# Altium PCB exam.PcbDoc
Units mm, origin at the board's own origin, x right, y up, seen from the top; angles counter-clockwise.
Board outline 57.4 x 46.48 mm, 2 copper layers (Top Layer, Bottom Layer); 19 components, 9 nets, 45 pads, 1 vias.
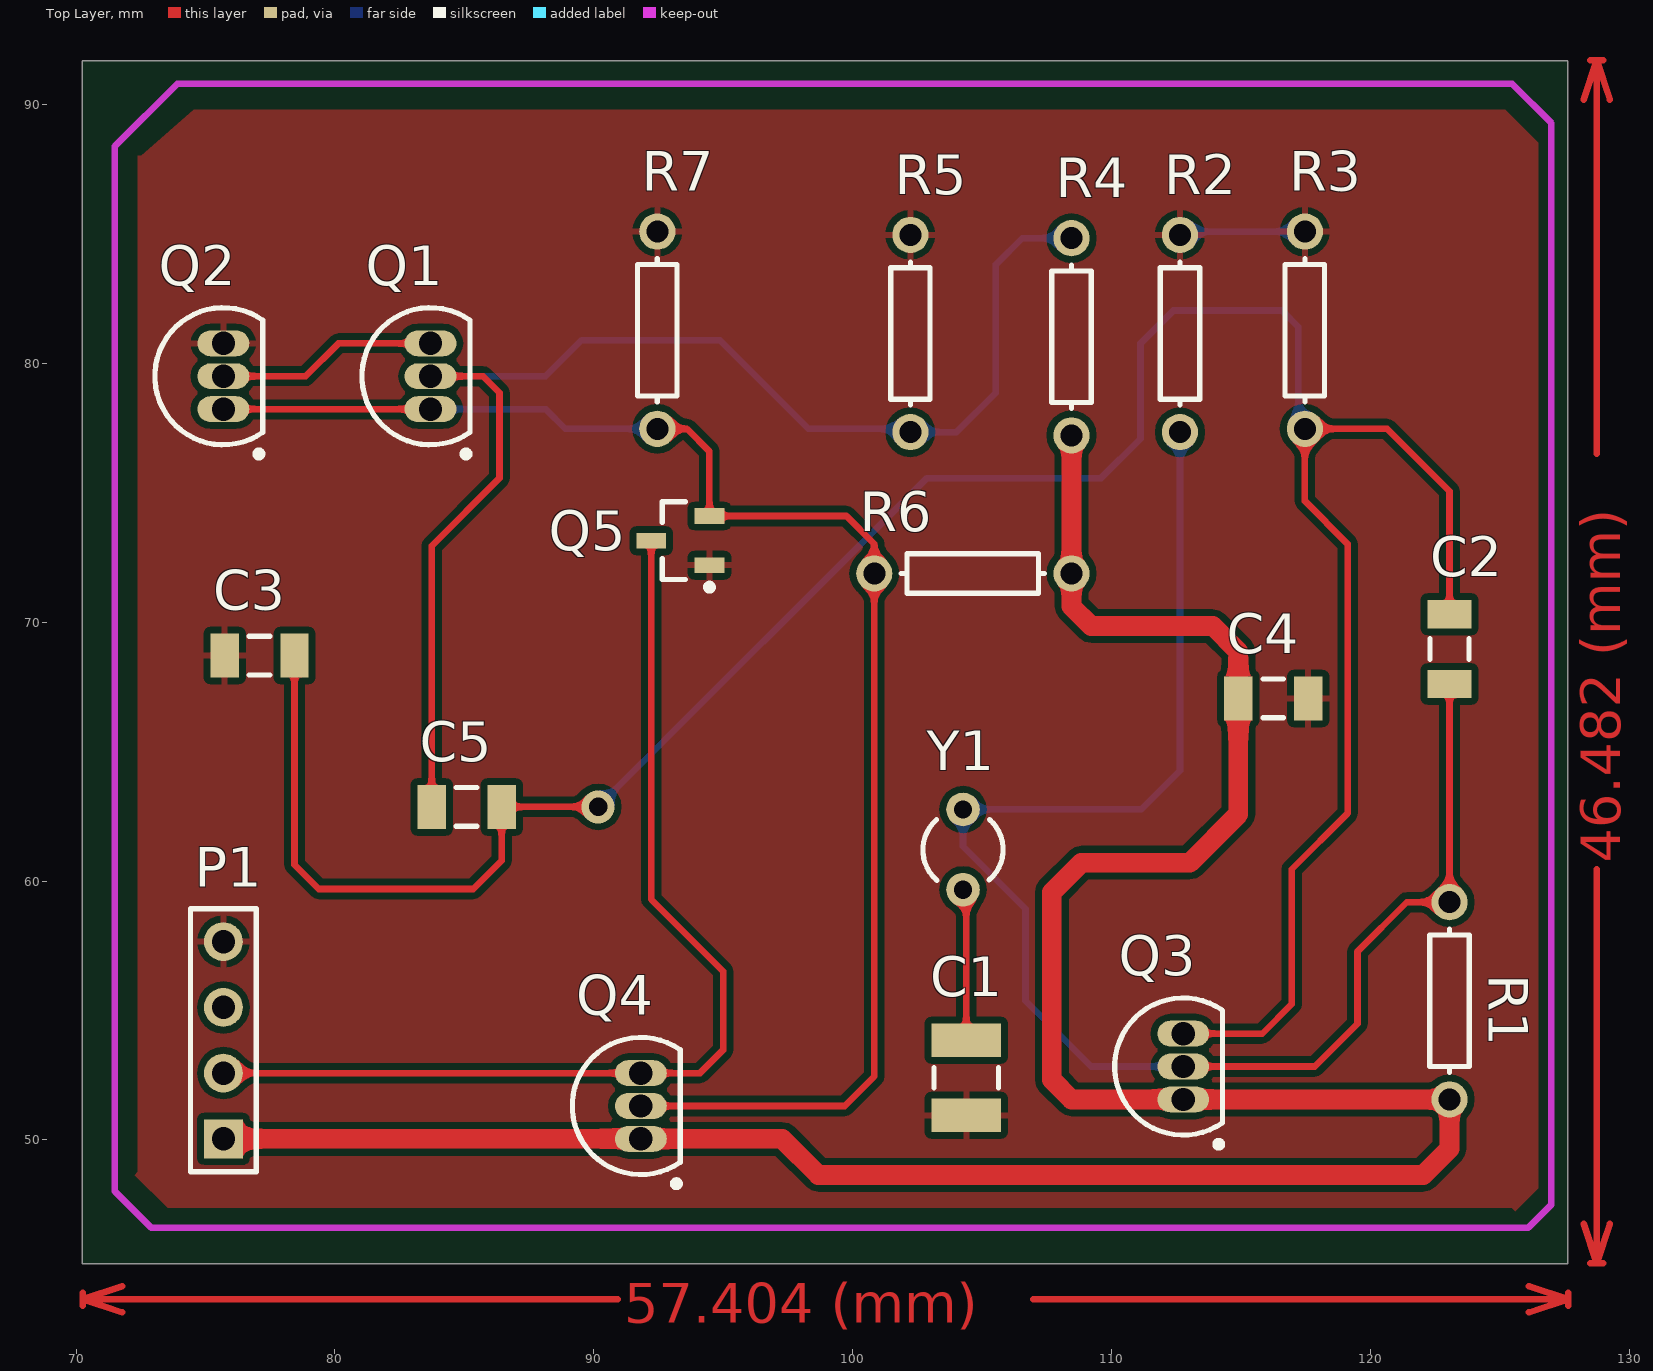
[diagram p0: Top Layer view]
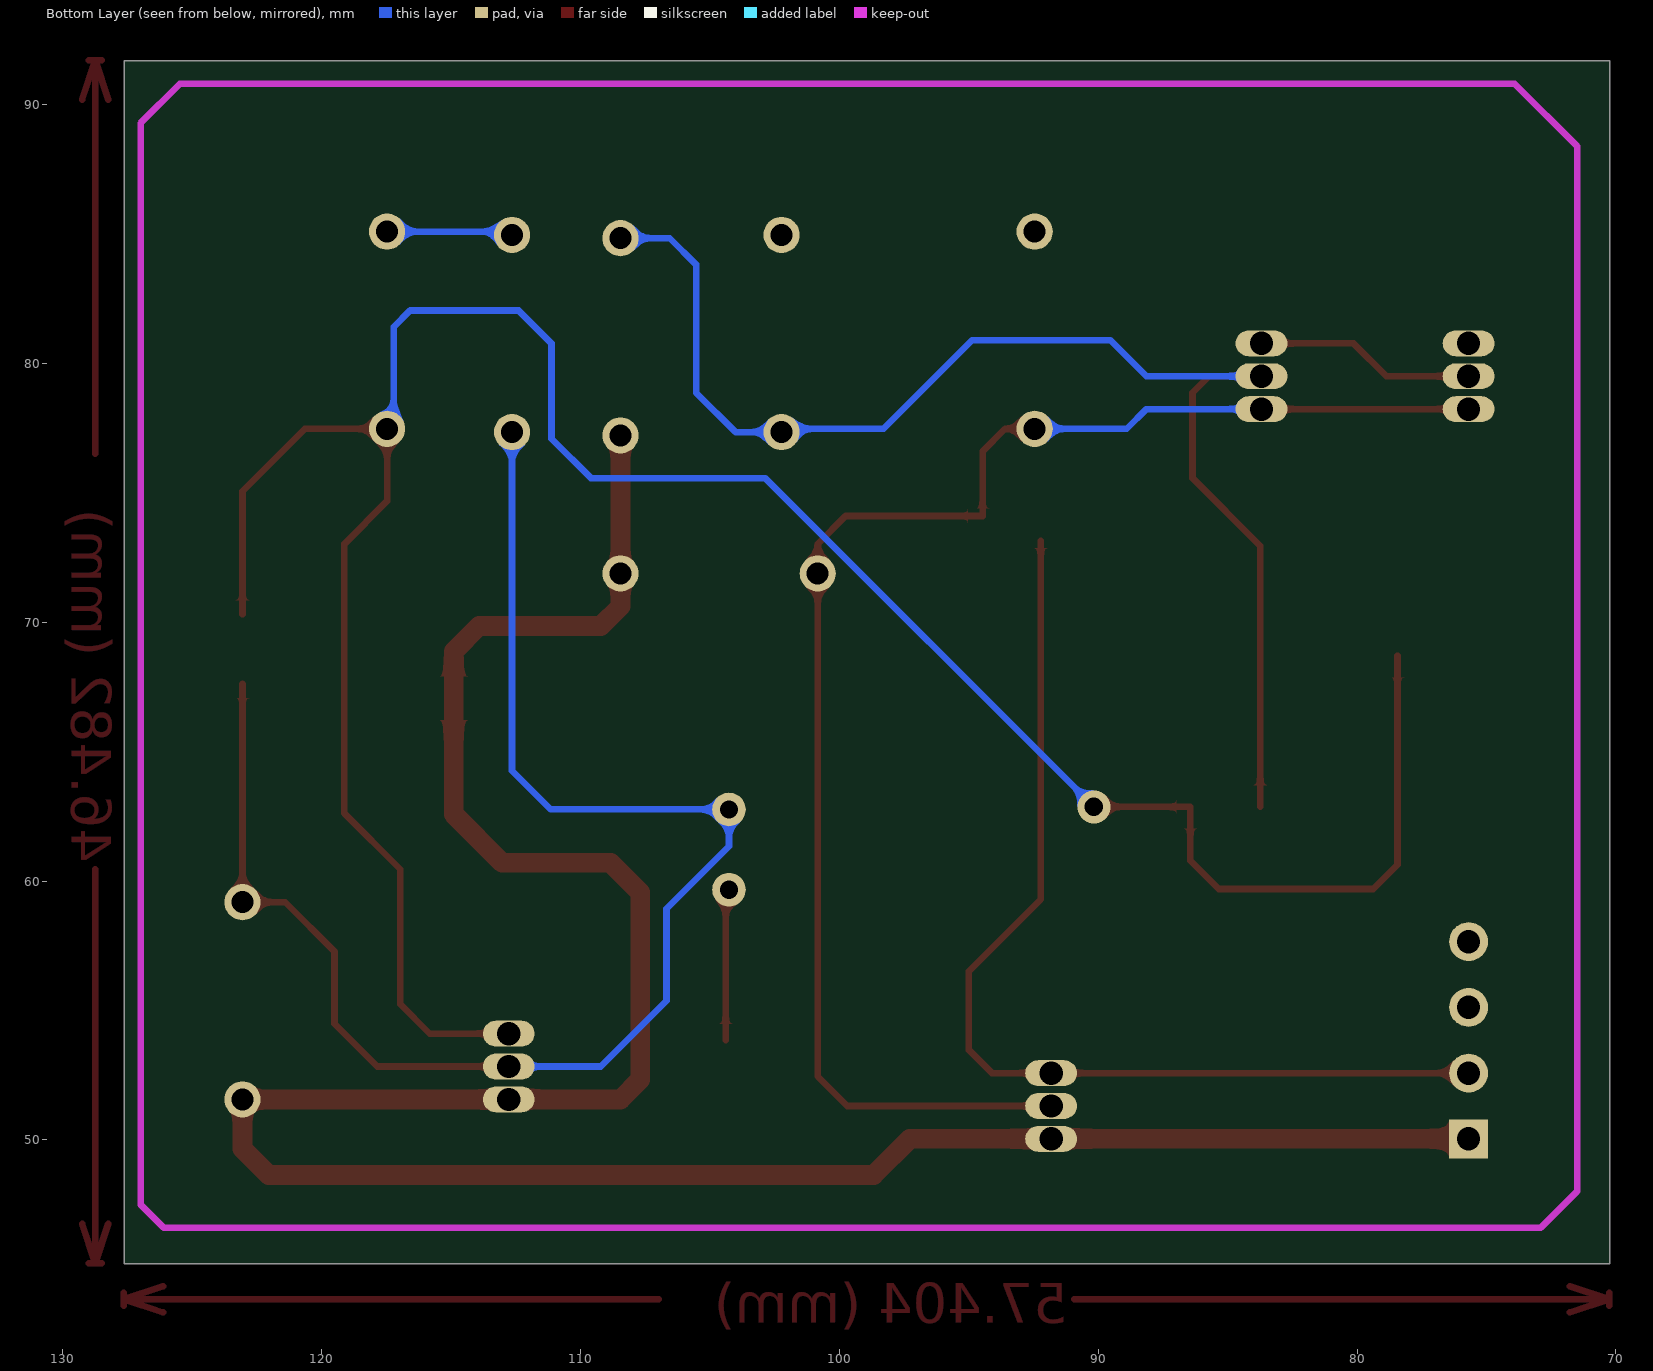
[diagram p1: Bottom Layer view, seen from below]

## Layer stack, top to bottom
Top Solder: solder mask 0.0102, Solder Resist, Dk 3.5
Top Layer: signal copper 0.0356
Dielectric 1: dielectric 0.32, FR-4, Dk 4.8
Bottom Layer: signal copper 0.0356
Bottom Solder: solder mask 0.0102, Solder Resist, Dk 3.5

## Board outline
70.231,45.212 127.635,45.212 127.635,91.694 70.231,91.694

## Design rules (kind name [scope] priority, off if disabled: settings)
Clearance [All] p1: gap=0.254 ignorepadtopadclearanceinfootprint=FALSE except(0: Arc-Hole Track-Hole SMDPad-Hole THPad-Hole Via-Hole Fill-Hole Poly-Hole Region-Hole Text-Hole)
MinimumSolderMaskSliver [All] p1: minsoldermaskwidth=0.066
PolygonConnect [All] p1: connectstyle=Relief reliefconductorwidth=0.254 reliefentries=4 polygonreliefangle="90 Angle" airgapwidth=0.254
RoutingVias [All] p1: holewidth=0.711 width=1.27 viastyle="Through Hole" minholewidth=0.711 minwidth=1.27 maxholewidth=0.711 maxwidth=1.27
SilkToSolderMaskClearance [IsPad] p1: minsilkscreentomaskgap=0.239 clearancetoexposedcopper=TRUE
SolderMaskExpansion [All] p1: expansion=0.102
Width VCC [InNet('VCC')] p1: maxlimit=1.016 minlimit=0.254 preferedwidth=0.762
Width [All] p2: maxlimit=0.254 minlimit=0.254 preferedwidth=0.254
28 further rules are at their usual default settings.

## Components (designator, comment, footprint, x,y, rotation, side; value= is the part's Value field where it differs from the comment)
C1 "Cap Var" C1210_N 104.394,52.398 r90 top value=60pF
C2 "Cap Semi" C1206 123.063,68.961 r270 top value=100pF
C3 "Cap Semi" C1206 77.089,68.707 r0 top value=100pF
C4 "Cap Semi" C1206 116.252,67.056 r180 top value=10nF
C5 "Cap Semi" C1206 85.09,62.865 r180 top value=1nF
P1 "Header 4" HDR1X4 75.692,50.038 r90 top
Q1 "NPN" TO-226-AA 83.693,79.502 r0 top
Q2 "NPN" TO-226-AA 75.692,79.502 r0 top
Q3 "NPN" TO-226-AA 112.776,52.832 r0 top
Q4 "NPN" TO-226-AA 91.821,51.308 r0 top
Q5 "PNP" SOT-23B_N 93.345,73.152 r180 top
R1 "Res1" AXIAL-0.3 123.063,55.372 r270 top value=47K
R2 "Res1" AXIAL-0.3 112.649,81.153 r270 top value=33K
R3 "Res1" AXIAL-0.3 117.475,81.28 r270 top value=1K
R4 "Res1" AXIAL-0.3 108.458,81.026 r270 top value=56K
R5 "Res1" AXIAL-0.3 102.235,81.153 r270 top value=17K
R6 "Res1" AXIAL-0.3 104.648,71.882 r0 top value=1K
R7 "Res1" AXIAL-0.3 92.456,81.28 r270 top value=22K
Y1 "14.31818MHz" R38 104.267,61.214 r0 top

## Footprints (in the part's own frame and the unit in brackets; to place one, negate y for a bottom-side part, rotate by r counter-clockwise, add the part's x,y. Pads: shape width x height; smd on the part's side, far side on the other; paste and mask are expansions set on the pad)
AXIAL-0.3 [mm] "Axial Device, Thru-Hole; 2 Leads; 0.3 in Pin Spacing"
  round 1.4 hole 0.85: 1(-3.81,0) 2(3.81,0)
  silkscreen extent -2.77,-0.76 2.77,0.76
C1206 [mm] "Chip Capacitor, Body 3.2x1.6mm, IPC High Density"
  rect 1.1x1.7 smd: 1(-1.35,0) 2(1.35,0)
  silkscreen extent -0.4,-0.75 0.4,0.75, body extent -1.7,-0.9 1.7,0.9, height 1.3
C1210_N [mm] "Chip Capacitor, Body 3.2x2.5mm, IPC Medium Density"
  rect 1.3x2.7 smd: 1(-1.45,0) 2(1.45,0)
  silkscreen extent -0.4,-1.25 0.4,1.25, body extent -1.7,-1.35 1.7,1.35, height 1.5
HDR1X4 [mm] "Connector; Header; 4 Position"
  rect 1.5x1.5 hole 0.9: 1(0,0)
  round 1.5 hole 0.9: 2(2.54,0) 3(5.08,0) 4(7.62,0)
  silkscreen extent -1.27,-1.27 8.89,1.27
R38 [mm] "Crystal, Thru-Hole; 2 Leads; Body 3.1 x 8.2 mm (Dia.xH)"
  round 1.3 hole 0.7: 1(0,1.55) 2(0,-1.55)
  silkscreen extent -1.55,-1.19 1.55,1.17
SOT-23B_N [mm] "SOT23, 3-Leads, Body 2.9x1.3mm, Pitch 0.95mm, Lead Span 2.4mm, IPC Medium Density"
  rect 1.15x0.6 smd: 1(-1.125,0.95) 2(-1.125,-0.95) 3(1.125,0)
  silkscreen extent -1.25,-1.5 0.7,1.92, body extent -0.7,-1.5 0.7,1.5, height 1.14
TO-226-AA [mm] "TO, Flat Index; 3 In-Line, Axial Leads; Body Dia. 4.8mm; Leads 0.55 x 0.51 mm (max)"
  oval 2x1 hole 0.9: 1(0,-1.27) 2(0,0) 3(0,1.27)
  silkscreen extent -2.65,-3.13 1.52,2.65, body extent -2.65,-2.66 1.52,2.66, height 5.33

## Part data
C1: "Variable or Adjustable Capacitor", Code_IPC=CAPC3225, Code_JEITA=1210, LatestRevisionDate=29-May-2009, LatestRevisionNote="IPC-7351 Footprint Added.", PackageDescription="Chip Capacitor 1210 Case Size", PackageReference=C1210, Published=24-Mar-1999, Publisher="Altium Limited"
C2 C3 C4 C5: "Capacitor (Semiconductor SIM Model)", LatestRevisionDate=29-May-2009, LatestRevisionNote="IPC-7351 Footprint Added.", PackageDescription="Chip Capacitor", PackageReference=C1206, Published=8-Jun-2000, Publisher="Altium Limited"
P1: "Header, 4-Pin", LatestRevisionDate=17-Jul-2002, LatestRevisionNote="Re-released for DXP Platform.", Publisher="Altium Limited"
Q1 Q2 Q3 Q4: "NPN Bipolar Transistor", Code_JEDEC=TO-226-AA, LatestRevisionDate=17-Jul-2002, LatestRevisionNote="Re-released for DXP Platform.", PackageDescription="TO, Flat Index; 3 In-Line, Axial Leads; Body Dia. 4.8mm; Leads 0.55 x 0.51 mm (max)", PackageReference=TO-226-AA, Published=8-Jun-2000, Publisher="Altium Limited"
Q5: "PNP Bipolar Transistor", LatestRevisionDate=29-May-2009, LatestRevisionNote="IPC-7351 Footprint Added.", PackageDescription="3-Pin SOT-23 Package 0.95 mm Pitch, 2.4 mm Lead Span", PackageReference=SOT-23B, PackageVersion=Aug-1999, Published=8-Jun-2000, Publisher="Altium Limited"
R1 R2 R3 R4 R5 R6 R7: "Resistor", LatestRevisionDate=17-Jul-2002, LatestRevisionNote="Re-released for DXP Platform.", PackageDescription="Axial Device, Thru-Hole; 2 Leads; 0.3 in Pin Spacing", PackageReference=AXIAL-0.3, Published=8-Jun-2000, Publisher="Altium Limited"
Y1: library part XTAL, "Crystal Oscillator", LatestRevisionDate=17-Jul-2002, LatestRevisionNote="Re-released for DXP Platform.", PackageDescription="Crystal, Thru-Hole; 2 Leads; Body 3.1 x 8.2 mm (Dia.xH)", PackageReference=R38, Published=8-Jun-2000, Publisher="Altium Limited"

## Via types
v1: diameter 1.27, hole 0.711, Top Layer to Bottom Layer, 1 vias

## Nets (pads, with @x,y where several pads share a name; then routed paths per layer and width w, separated by ;. In a path a pad name is that pad's centre, name@x,y a point inside that pad or via, vN(x,y) a via of type N, cw(c..) or ccw(c..) an arc to the next point about the centre after c; other vN are vias at no path point)
GND: C1.1 C3.1 C4.1 P1.4 Q2.3 Q5.1 R2.1 R3.1 R5.1 R7.1 | length 4.9
  Top Layer w0.254: R2.1 R2.1@112.776,85.09
  Bottom Layer w0.254: R2.1@112.776,85.09 R3.1
NetC1_2: C1.2 Y1.2 | length 5.9
  Top Layer w0.254: Y1.2 104.394,59.537 C1.2
NetC2_1: C2.1 C3.2 C5.1 Q3.3 R3.2 | length 104
  Top Layer w0.254: C3.2 78.439,60.626 79.375,59.69 85.344,59.69 86.44,60.786 C5.1 v1(90.17,62.865) ; Q3.3 115.824,54.102 116.967,55.245 116.967,60.452 119.126,62.611 119.126,73.025 117.475,74.676 R3.2 120.65,77.47 123.063,75.057 C2.1
  Bottom Layer w0.254: v1(90.17,62.865) 102.87,75.565 109.601,75.565 111.125,77.089 111.125,80.772 112.395,82.042 116.586,82.042 117.221,81.407 117.221,77.724 R3.2
NetC2_2: C2.2 Q3.2 R1.1 R2.2 Y1.1 | length 60.6
  Top Layer w0.254: Q3.2 117.856,52.832 119.507,54.483 119.507,57.277 121.412,59.182 R1.1 C2.2
  Bottom Layer w0.254: R2.2 112.649,64.262 111.151,62.764 Y1.1 104.267,61.341 106.68,58.928 106.68,55.372 109.22,52.832 Q3.2
NetC5_2: C5.2 Q1.2 R4.1 R5.2 | length 52.8
  Top Layer w0.254: Q1.2 85.725,79.502 86.36,78.867 86.36,75.565 83.74,72.945 C5.2
  Bottom Layer w0.254: Q1.2 88.138,79.502 89.535,80.899 94.869,80.899 98.298,77.47 102.108,77.47 R5.2 104.013,77.343 105.537,78.867 105.537,83.82 106.553,84.836 R4.1
NetP1_2: P1.2 Q4.3 Q5.3 | length 40.5
  Top Layer w0.254: P1.2 Q4.3 94.107,52.578 94.996,53.467 94.996,56.515 92.22,59.291 Q5.3
NetQ1_1: Q1.1 Q2.1 Q4.2 Q5.2 R6.1 R7.2 | length 58.8
  Top Layer w0.254: Q2.1 Q1.1 ; Q4.2 99.695,51.308 100.838,52.451 R6.1 100.838,73.025 99.761,74.102 Q5.2 94.47,76.599 93.599,77.47 R7.2
  Bottom Layer w0.254: Q1.1 88.138,78.232 88.9,77.47 R7.2
NetQ1_3: Q1.3 Q2.2 | length 8.5
  Top Layer w0.254: Q2.2 78.867,79.502 80.137,80.772 Q1.3
VCC: C4.2 P1.1 Q3.1 Q4.1 R1.2 R4.2 R6.2 | length 101.7
  Top Layer w0.762: P1.1 Q4.1 97.282,50.038 98.679,48.641 122.047,48.641 123.063,49.657 R1.2 Q3.1 108.458,51.562 107.696,52.324 107.696,59.563 108.839,60.706 113.03,60.706 114.902,62.578 C4.2 114.902,68.867 113.919,69.85 109.22,69.85 108.458,70.612 R6.2 R4.2
pads on no net: P1.3
copper on no net: | length 86.7
  Top Layer w0.254: 70.254,43.586 70.254,44.094 ; 71.778,43.332 70.254,43.84 ; 71.778,44.348 70.254,43.84 ; 90.932,43.84 70.254,43.84 ; 106.98,43.84 127.658,43.84 ; 126.134,43.332 127.658,43.84 ; 126.134,44.348 127.658,43.84 ; 127.658,43.586 127.658,44.094 ; 128.245,46.759 128.753,45.235 ; 128.245,90.193 128.753,91.717 ; 128.499,45.235 129.007,45.235 ; 128.499,91.717 129.007,91.717 ; 128.753,60.452 128.753,45.235 ; 128.753,76.5 128.753,91.717 ; 129.261,46.759 128.753,45.235 ; 129.261,90.193 128.753,91.717

## Polygon pours and split planes (outlines as drawn)
GND on Top Layer "Top Layer-No Net" (solid, pour order 6): 72.39,88.011 72.517,88.011 74.549,89.789 125.222,89.789 126.492,88.519 126.492,48.133 125.603,47.244 125.476,47.371 73.533,47.371 72.263,48.641 72.39,48.768

## Keep-outs
Keep-Out Layer:
  lines w0.254: 71.501,48.006 71.501,88.392 73.914,90.805 125.476,90.805 127,89.281 127,47.498 126.111,46.609 72.898,46.609 71.501,48.006

## Other copper
Top Layer:
  text "46.482 (mm)" at 129.667,60.706 h1.52 r90
  text "57.404 (mm)" at 91.186,42.926 h1.52